# EAGLE board sensorBoard_1.0 (EAGLE 6.6.0)
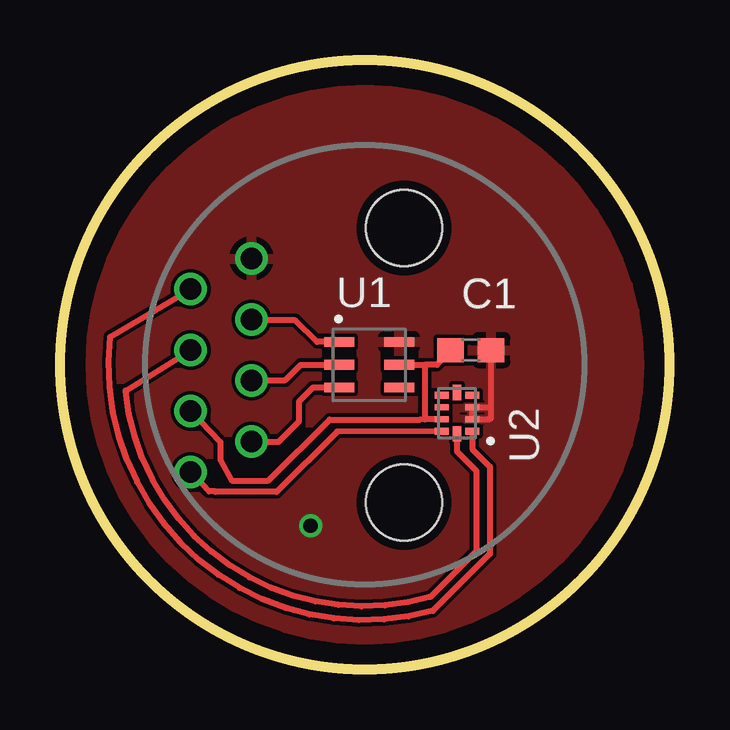
[diagram p0: board, top side]
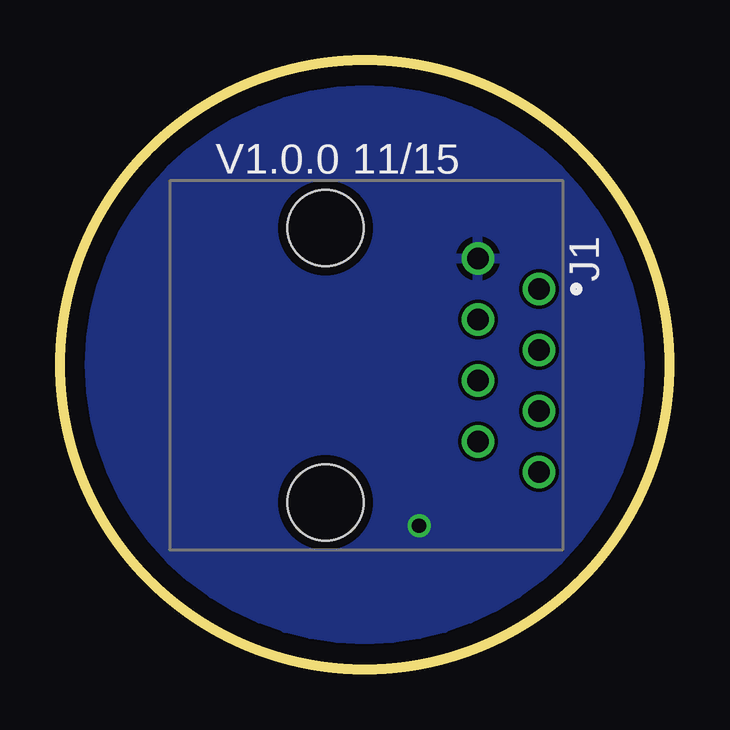
[diagram p1: board, bottom side, seen from below]

Size 25.4 x 25.4 mm. Coordinates in mm from the lower left corner, seen from the top.
Outline: circle at 12.7,12.7 radius 12.7
Copper layers (1*16): Top 0.0356mm / dielectric 1.5011mm / Bottom 0.0356mm
Design rules "LaenPCBOrder": minimum track width 6mil, minimum drill 13mil, track to track 6mil, track to pad 6mil, pad to pad 6mil, via to via 6mil, smd to smd 6mil, copper to edge 15mil, drill to drill 6mil, minimum pad ring 7mil, minimum via ring 7mil, stop-mask expansion 3mil, vias tented up to drill 0mil, thermal gap 10mil

## Footprints (pad centres in the part's own frame; a part is rotated, then mirrored left to right if it is on the bottom)
C0603 = smd 1.1 x 1: 1 -0.85,0; 2 0.85,0
MJACK8P8C = drill 0.9: 1 -3.175,5.649; 2 -0.635,5.649; 3 1.905,5.649; 4 4.445,5.649; 5 -4.445,3.109; 6 -1.905,3.109; 7 0.635,3.109; 8 3.175,3.109 | hole 3.17: -5.715,-3.241; 5.715,-3.241
TCS3414 = smd 1.25 x 0.4: 1 -1.25,0.95; 2 -1.25,0; 3 -1.25,-0.95; 4 1.25,-0.95; 5 1.25,0; 6 1.25,0.95
ADS1118 = smd 0.3 x 0.58: 1 -0.75,-0.64; 4 0.75,-0.64; 6 0.75,0.64; 9 -0.75,0.64 | smd 0.25 x 0.58: 2 -0.25,-0.64; 3 0.25,-0.64; 7 0.25,0.64; 8 -0.25,0.64 | smd 0.63 x 0.35: 5 0.86,0; 10 -0.86,0

## Placement (x,y rotation side)
C1  0.2uF  [C0603]  17.12,13.31 0 top
J1  MJACK8P8CVERT  [MJACK8P8C]  11.09,12.68 270 bottom
U1  TCS3414FN  [TCS3414]  12.88,12.7 0 top
U2  ADS1118RUG  [ADS1118]  16.54,10.68 90 top

## Library data of the parts
C1 = resistor
J1 U1 U2 = wavemeter

## Nets
GND: C1.2 J1.5 U1.6 U2.2 U2.3
N$1: J1.6 U1.1
N$2: J1.7 U1.2
N$3: J1.8 U1.3
N$4: C1.1 J1.3 U1.5 U2.8
N$7: J1.4 U2.9
N$8: J1.2 U2.10
N$9: J1.1 U2.1

## Tracks (layer width: path | path; a pad name or v marks a point on that pad's centre or on a via)
GND  (via drill 0.6)
  Top 0.254: 17.91,10.95 17.91,10.93 U2.3 U2.2 17.91,10.43 17.91,10.49 17.96,10.49 C1.2
  other vias: 10.44,5.99
  pour Top: 24.15,12.7 arc180 1.25,12.7 arc180
  pour Bottom: 24.15,12.7 arc180 1.25,12.7 arc180
N$1
  Top 0.254: U1.1 10.71,13.65 9.8,14.55 8.02,14.55 J1.6
N$2
  Top 0.254: 11.52,12.6 U1.2 10.03,12.7 9.39,12.06 J1.7
N$3
  Top 0.254: U1.3 10.54,11.75 9.95,11.17 9.95,10.33 9.41,9.79 9.4,9.79 9.1,9.48 8.02,9.48 J1.8
N$4
  Top 0.254: C1.1 15.93,12.93 15.7,12.7 15.2,12.7 | U2.8 15.2,10.42 | 15.2,10.42 15.01,10.42 11.23,10.42 8.69,7.87 7.16,7.87 6.68,8.74 6.68,9.49 J1.3 | U1.5 15.2,12.7 | 15.2,12.7 15.2,10.42
N$7
  Top 0.254: U2.9 11.54,9.92 9.03,7.41 6.48,7.41 6.46,7.42 6.21,7.42 J1.4
N$8
  Top 0.254: J1.2 2.73,11.62 arc100 15.45,3.03 17.35,4.93 17.35,8.28 16.54,9.09 U2.10
N$9
  Top 0.254: J1.1 2.09,13.87 arc112 15.54,2.45 17.91,4.82 17.91,8.46 17.18,9.19 U2.1

## Text on the board
bNames: V1.0.0 11/15